# Altium PCB Relay_Controller_REV4.PcbDoc (part 1 of 2)
Units mil, origin at the board's own origin, x right, y up, seen from the top; angles counter-clockwise.
Board outline 5513 x 4000 mil, 2 copper layers (Top Layer, Bottom Layer), stack 62.2 mil thick; 134 components, 86 nets, 434 pads, 146 vias.
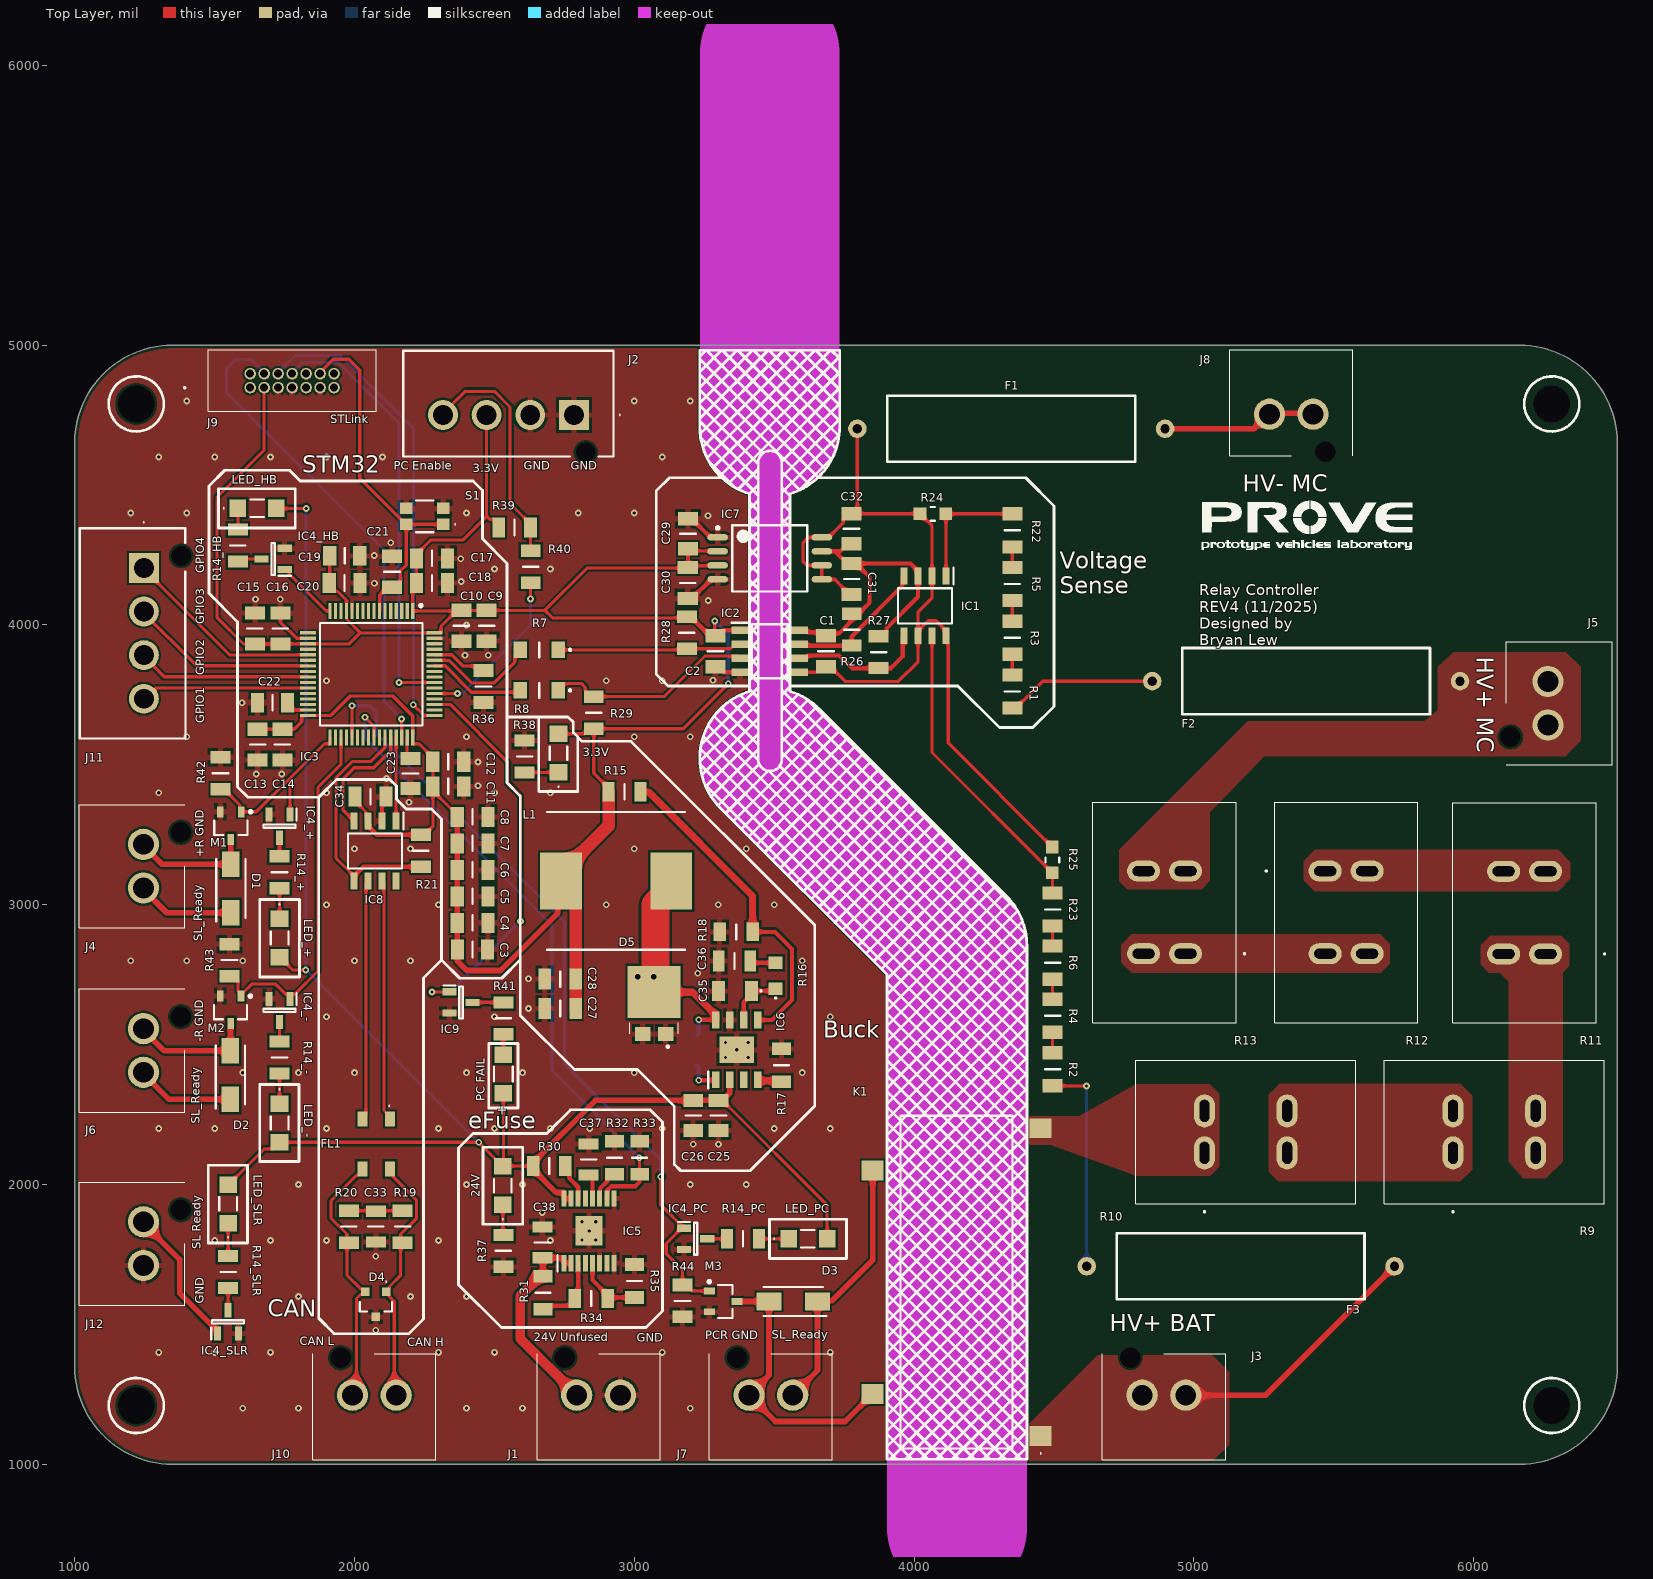
[diagram p0: Top Layer view]
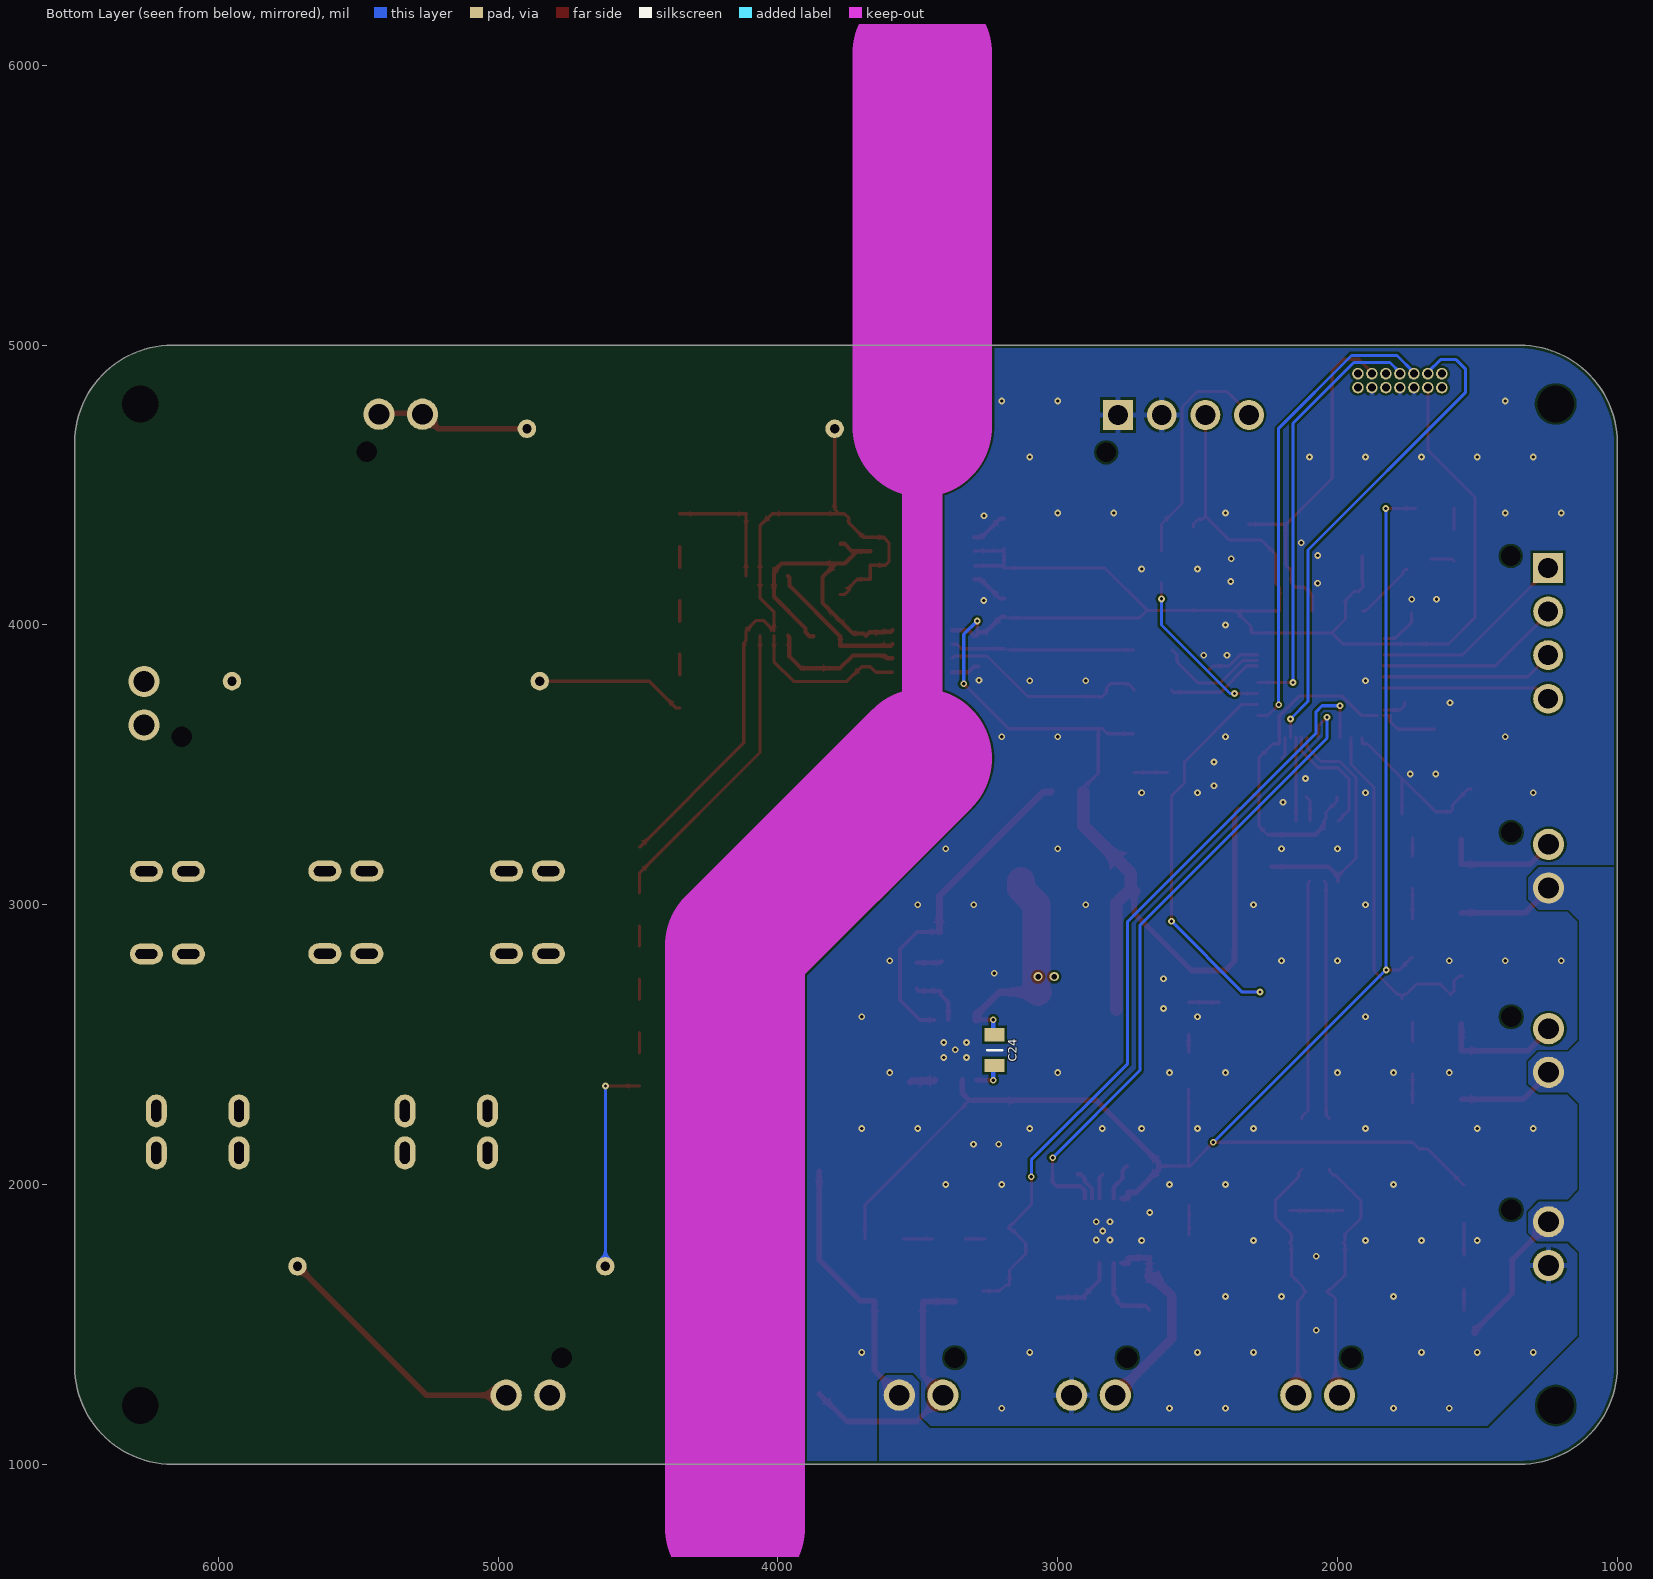
[diagram p1: Bottom Layer view, seen from below]
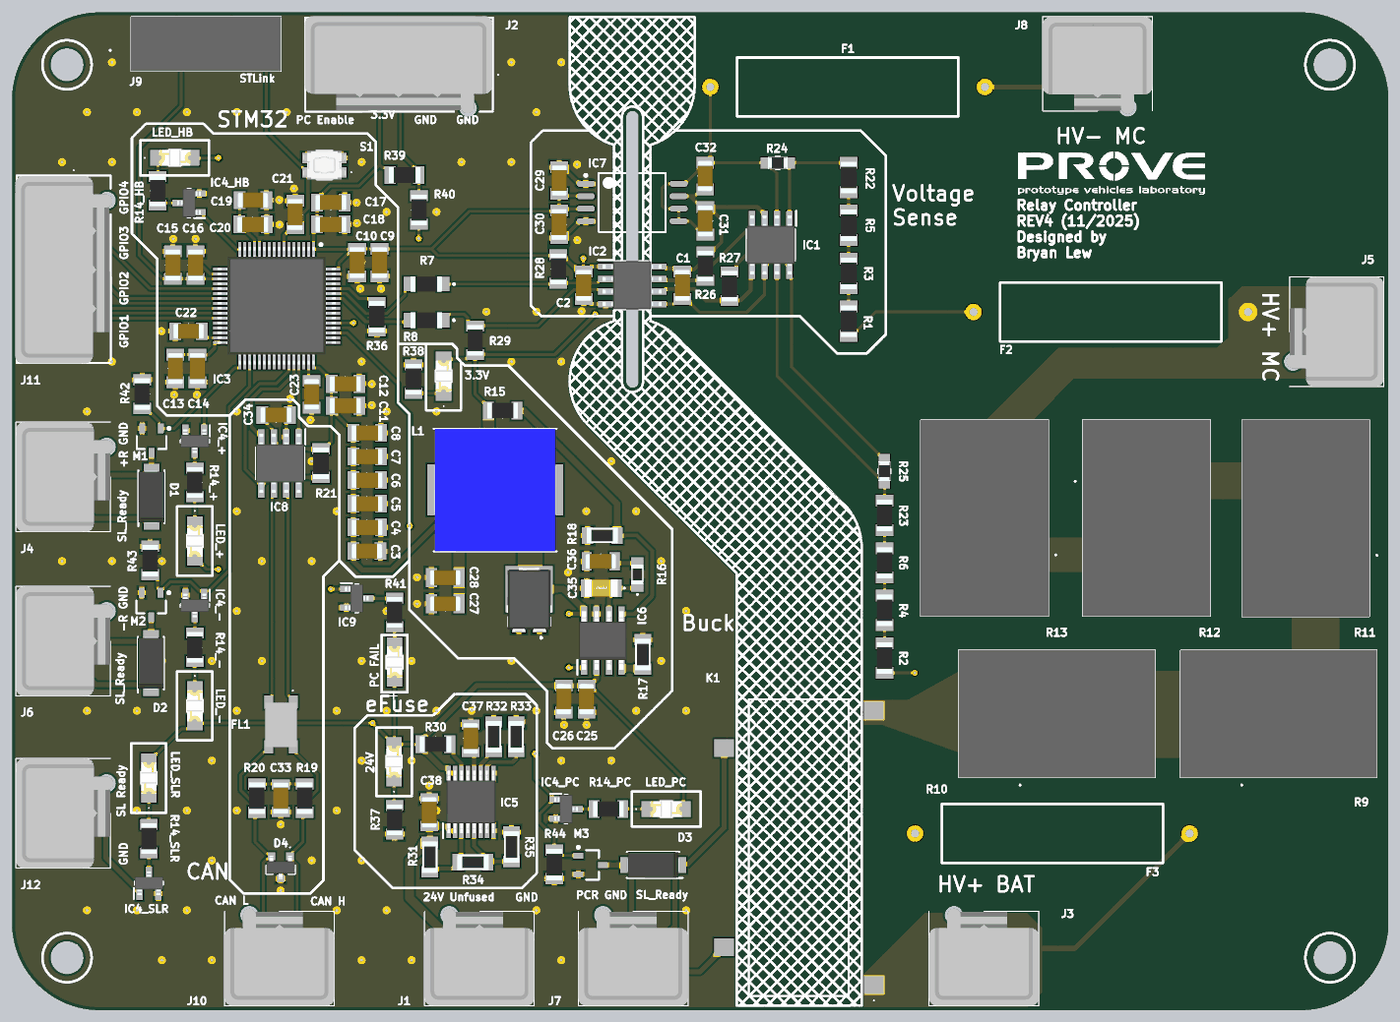
[diagram p2: 3D render of the assembled board from above, using the file's embedded part models]

## Layer stack, top to bottom
Top Solder: solder mask 0.4, Solder Resist, Dk 3.5
Top Layer: signal copper 1.4
Dielectric 1: dielectric 59.4, FR-4, Dk 4.3
Bottom Layer: signal copper 1.4
Bottom Solder: solder mask 0.4, Solder Resist, Dk 3.5

## Board outline
1000,1350 1000,4650 cw(c1350,4650) 1350,5000 6163,5000 cw(c6163,4650) 6513,4650 6513,1350 cw(c6163,1350) 6163,1000 1350,1000 cw(c1350,1350)
cut-out: 3459.97,3520 ccw(c3484.99,3520) 3510,3520 3510,4580 ccw(c3484.99,4580) 3459.97,4580

## Design rules (kind name [scope] priority, off if disabled: settings)
BoardOutlineClearance [All] p1: gap=11.81 ignorepadtopadclearanceinfootprint=FALSE except(15.75: Arc-SplitBarrior Arc-SplitContinuation Track-SplitBarrior Track-SplitContinuation SMDPad-SplitBarrior SMDPad-SplitContinuation THPad-SplitBarrior THPad-SplitContinuation Via-SplitBarrior Via-SplitContinuation Fill-SplitBarrior Fill-SplitContinuation Poly-SplitBarrior Poly-SplitContinuation Region-SplitBarrior Region-SplitContinuation Text-SplitBarrior Text-SplitContinuation)
Clearance "Clearance Different Nets" [All] p1: gap=7.87 ignorepadtopadclearanceinfootprint=FALSE except(3.5: Arc-Arc Arc-Track Arc-SMDPad Track-Track Track-SMDPad; 5: SMDPad-SMDPad SMDPad-Via THPad-Via Via-Via; 10: Arc-Via Arc-Text Track-Via Track-Text SMDPad-Text THPad-Text Via-Text Fill-Text Poly-Text Region-Text Text-Text; 19.68: THPad-THPad Via-Hole)
Clearance "Clearance Same Nets" [All] p2: gap=7.87 ignorepadtopadclearanceinfootprint=FALSE except(3.5: Arc-Arc Arc-Track Arc-SMDPad Track-Track Track-SMDPad SMDPad-SMDPad; 5: SMDPad-Via THPad-Via; 10: Arc-Via Arc-Text Track-Via Track-Text SMDPad-Text THPad-Text Via-Via Via-Text Fill-Text Poly-Text Region-Text Text-Text)
Clearance "Clearance Bottom Layer" [OnLayer('Bottom Layer')] p3: gap=8 ignorepadtopadclearanceinfootprint=TRUE except(10: Arc-Text Track-Text SMDPad-Text THPad-Text Via-Text Fill-Text Poly-Text Region-Text Text-Text)
Clearance "Clearance Top Layer" [OnLayer('Top Layer')] p4: gap=8 ignorepadtopadclearanceinfootprint=TRUE except(10: Arc-Text Track-Text SMDPad-Text THPad-Text Via-Text Fill-Text Poly-Text Region-Text Text-Text)
Height [All] p1 off: minheight=0 maxheight=1000 prefheight=500
HoleSize [All] p1: absolutevalues=TRUE maxlimit=248.03 minlimit=7.87 maxpercent=80.000 minpercent=20.000
MinimumAnnularRing [All] p1: minimumring=5.12
MinimumSolderMaskSliver [All] p1: minsoldermaskwidth=3.94
PolygonConnect PolygonConnectPowerPads [InPolygonClass('PowerPolygons')] p1: connectstyle=Direct reliefconductorwidth=10 reliefentries=4 polygonreliefangle="90 Angle" airgapwidth=10
PolygonConnect PolygonConnect_1 [All] p2: thpad.connectstyle=Relief thpad.reliefconductorwidth=20 thpad.reliefentries=4 thpad.polygonreliefangle="90 Angle" thpad.airgapwidth=10 smdpad.connectstyle=Relief smdpad.reliefconductorwidth=20 smdpad.reliefentries=4 smdpad.polygonreliefangle="90 Angle" smdpad.airgapwidth=10 via.connectstyle=Direct via.reliefconductorwidth=20 via.reliefentries=4 via.polygonreliefangle="90 Angle" via.airgapwidth=10
RoutingCorners [All] p1: cornerstyle=Round minsetback=100 maxsetback=100
RoutingVias [All] p1: holewidth=19.68 width=39.37 viastyle="Through Hole" minholewidth=7.87 minwidth=13.78 maxholewidth=39.37 maxwidth=78.74
SilkToSilkClearance [All] p1: silktosilkclearance=3.94
SilkToSolderMaskClearance [IsPad] p1: minsilkscreentomaskgap=3.94 clearancetoexposedcopper=TRUE
SolderMaskExpansion [All] p1: expansion=4 istentingtop=FALSE
SupplyNets "Schematic Supply Nets" [InNet('GND')] p1: voltage=0.000
Width [All] p1: maxlimit=100 minlimit=3.5 preferedwidth=15
24 further rules are at their usual default settings.

## Classes and differential pairs
component class PC_Fail: IC9 "PC FAIL" R41
component class VoltageSense: C1 C2 F1 F2 F3 IC1 IC2 R1 R2 R3 R4 R5 R6 R22 R23 R24 R25 R26 R27 R28 R29
component class +: IC4_+ LED_+ R14_+
component class -: IC4_- LED_- R14_-
component class CAN: C33 C34 D4 FL1 IC8 R19 R20 R21
component class "3.3V Isolation": C29 C30 C31 C32 IC7
polygon class PowerPolygons: HV+_BAT_L01_P007 HV+_MC_UNFUSED_L01_P029 NETK1_2_L01_P009 NETR9_2_L01_P013 NETR10_2_L01_P014 NETR11_2_L01_P015 NETR12_2_L01_P017 SL_READY_L02_P028
channel class LED_Driver: + - HB PC SLR
component class "24V to 3.3V Buck": 3.3V C24 C25 C26 C27 C28 C35 C36 D5 IC6 L1 R15 R16 R17 R18 R38
component class PC: IC4_PC LED_PC R14_PC
component class HB: IC4_HB LED_HB R14_HB
component class SLR: IC4_SLR LED_SLR R14_SLR
component class STM32: C3 C4 C5 C6 C7 C8 C9 C10 C11 C12 C13 C14 C15 C16 C17 C18 C19 C20 C21 C22 C23 IC3 R7 R8 R36 R39 R40 S1
component class "Relay Controller": D1 D2 D3 K1 M1 M2 M3 R9 R10 R11 R12 R13 R42 R43 R44
component class eFuse: 24V C37 C38 IC5 R30 R31 R32 R33 R34 R35 R37
component class Connectors: J1 J2 J3 J4 J5 J6 J7 J8 J9 J10 J11 J12

## Components (designator, comment, footprint, x,y, rotation, side; value= is the part's Value field where it differs from the comment)
3.3V "156120VS75000" 156120VS75000 2729,3542 r90 top
24V "156120VS75000" 156120VS75000 2530,1996 r90 top
C1 "100n" CAPC3216X94N 3685,3906 r270 top
C2 "100n" CAPC3216X94N 3290,3906 r270 top
C3 "4.7u" CAPC3216X180N 2421.41,2840 r0 top
C4 "100n" CAPC3216X94N 2422,2935.43 r0 top
C5 "100n" CAPC3216X94N 2422,3030.07 r0 top
C6 "100n" CAPC3216X94N 2422,3124.71 r0 top
C7 "100n" CAPC3216X94N 2422,3219.36 r0 top
C8 "100n" CAPC3216X94N 2422,3314 r0 top
C9 "100n" CAPC3216X94N 2472,3997 r270 top
C10 "100n" CAPC3216X94N 2382,3997 r270 top
C11 "100n" CAPC3216X94N 2335,3423 r0 top
C12 "100n" CAPC3216X94N 2335,3511 r0 top
C13 "100n" CAPC3216X94N 1654,3572.12 r270 top
C14 "100n" CAPC3216X94N 1742,3572.12 r270 top
C15 "100n" CAPC3216X94N 1644,3987 r90 top
C16 "100n" CAPC3216X94N 1735,3987 r90 top
C17 "100n" CAPC3216X94N 2277,4238 r0 top
C18 "100n" CAPC3216X94N 2277,4150 r0 top
C19 "1u" CAPC3216X180N 1965,4247 r0 top
C20 "100n" CAPC3216X94N 1964.41,4150 r0 top
C21 "100n" CAPC3216X94N 2134,4190 r90 top
C22 "2.2u" CAPC3216X180N 1707,3722 r180 top
C23 "2.2u" CAPC3216X180N 2200,3469 r270 top
C24 "100n" CAPC3216X94N 3225,2480 r90 bottom
C25 "4.7u" CAPC3216X180N 3301,2247 r270 top
C26 "4.7u" CAPC3216X180N 3210,2247 r270 top
C27 "CL31X107MQKNNWE" CAPC3216X190N 2735,2629 r180 top
C28 "CL31X107MQKNNWE" CAPC3216X190N 2735,2734 r180 top
C29 "10u" CAPC3216X180N 3191.79,4326 r90 top
C30 "100n" CAPC3216X94N 3191,4150 r270 top
C31 "100n" CAPC3216X94N 3776.79,4164 r270 top
C32 "22u" CAPC3216X180N 3776,4344 r90 top
C33 "4.7n" CAPC3216X75N 2076.39,1849.53 r270 top
C34 "100n" CAPC3216X94N 2057,3386 r0 top
C35 "18p" C1206 3360,2692 r180 top
C36 "22n" CAPC3216X170N 3358,2799 r180 top
C37 "0.47u" CAPC3216X152N 2837,2089.5 r90 top
C38 "1u" CAPC3216X178N 2671,1793 r90 top
D1 "RGF1M-E3_67A" DIOM5426X300N 1558,3058 r90 top
D2 "RGF1M-E3_67A" DIOM5426X300N 1556,2391 r90 top
D3 "RGF1M-E3_67A" DIOM5426X300N 3568,1582 r180 top
D4 "SM24CANB-02HTG" SM24CANB02HTG 2076,1572 r180 top
D5 "STPS5S100SFY" STPS10L40CSF 3070.94,2658.08 r0 top
F1 "0ADKP0500-RE" 0ADKP0500-RE 4347,4701 r180 top
F2 "0ADKP0500-RE" 0ADKP0500-RE 5401,3799 r180 top
F3 "0ADKP0500-RE" 0ADKP0500-RE 5167,1708 r180 top
FL1 "ACT45B-510-2P-TL003" ACT45B1012PTL003 2077,2145 r270 top
IC1 "MCP3422A1T-E_SN" SOIC127P600X175-8N 4039,4068 r270 top
IC2 "ISO1640BQDRQ1" SOIC127P600X175-8N 3484,3906 r0 top
IC3 "STM32F405RGT7" QFP50P1200X1200X160-64N 2060,3824 r270 top
IC4_+ "DMN61D8LQ-13" SOT96P240X110-3N 1732,3281.03 r270 top (schematic designator IC4)
IC4_- "DMN61D8LQ-13" SOT96P240X110-3N 1732,2622.03 r270 top (schematic designator IC4)
IC4_HB "DMN61D8LQ-13" SOT96P240X110-3N 1709,4236 r180 top (schematic designator IC4)
IC4_PC "DMN61D8LQ-13" SOT96P240X110-3N 3218.97,1806 r0 top (schematic designator IC4)
IC4_SLR "DMN61D8LQ-13" SOT96P240X110-3N 1548,1509 r90 top (schematic designator IC4)
IC5 "TPS26600PWPR" SOP65P640X120-17N 2837.8,1834.67 r90 top
IC6 "TPS54560BQDDARQ1" SOIC127P600X170-9N 3366,2481.23 r90 top
IC7 "MIE05W0505BGYE-3R-Z" SOIC127P1030X265-8N 3484,4238 r0 top
IC8 "TCAN337GD" SOIC127P600X175-8N 2073,3192 r270 top
IC9 "DMN61D8LQ-13" SOT96P240X110-3N 2380.52,2650.9 r0 top
J1 "1877285-2" 18772852 2872.05,1395.03 r0 top
J2 "1877285-4" 18772854 2783.91,4750.42 r180 top
J3 "1877285-2" 18772852 4892.95,1395.03 r0 top
J4 "1877285-2" 18772852 1393.46,3137.95 r270 top
J5 "1877285-2" 18772852 6116.97,3719.95 r90 top
J6 "1877285-2" 18772852 1393.46,2479.05 r270 top
J7 "1877285-2" 18772852 3487.95,1395.03 r0 top
J8 "1877285-2" 18772852 5348.05,4605.09 r180 top
J9 "SHF-107-01-L-D-TH" SHF10701LDTH 1627,4848 r0 top
J10 "1877285-2" 18772852 2071,1395.03 r0 top
J11 "1877285-4" 18772854 1247,4203.91 r270 top
J12 "1877285-2" 18772852 1393.46,1789.05 r270 top
K1 "KT24-1A-40L-SMD" KT241A40LSMD 4152,1651 r90 top
L1 "18uH" INDPM125125X800N 2935,3085 r180 top
LED_+ "156120VS75000" 156120VS75000 1732,2881 r270 top (schematic designator LED)
LED_- "156120VS75000" 156120VS75000 1732,2220 r270 top (schematic designator LED)
LED_HB "156120VS75000" 156120VS75000 1652,4417 r0 top (schematic designator LED)
LED_PC "156120VS75000" 156120VS75000 3620.28,1805.91 r0 top (schematic designator LED)
LED_SLR "156120VS75000" 156120VS75000 1548,1931 r90 top (schematic designator LED)
M1 "ZXMS6004FF-7" SOT95P240X100-3N 1558,3283 r270 top
M2 "ZXMS6004FF-7" SOT95P240X100-3N 1557,2624 r270 top
M3 "ZXMS6004FF-7" SOT95P240X100-3N 3317,1582 r0 top
"PC FAIL" "Red, 2V, 140°" "WL-SMRW_1206 rectangular_normal use" 2532,2395 r270 top
R1 "510k" RESC3216X75N 4351,3762 r270 top
R2 "510k" RESC3216X75N 4495,2411.94 r270 top
R3 "510k" RESC3216X75N 4351,3954 r270 top
R4 "510k" RESC3216X75N 4495,2603 r270 top
R5 "510k" RESC3216X75N 4351,4146 r270 top
R6 "510k" RESC3216X75N 4495,2792.94 r270 top
R7 "33" ERJ8ENF1000V 2660,3911 r180 top
R8 "33" ERJ8ENF1000V 2660,3766 r180 top
R9 "TWW20J100E" TWW20J100E 5037.72,2113 r0 top
R10 "TWW20J100E" TWW20J100E 5926,2113 r0 top
R11 "TWW20J100E" TWW20J100E 6256.77,2824 r90 top
R12 "TWW20J100E" TWW20J100E 5469,3120.28 r270 top
R13 "TWW20J100E" TWW20J100E 4970,2825 r90 top
R14_+ "1k" RESC3116X65N 1732,3116 r90 top (schematic designator R14)
R14_- "1k" RESC3116X65N 1732,2454 r90 top (schematic designator R14)
R14_HB "1k" RESC3116X65N 1583,4284 r270 top (schematic designator R14)
R14_PC "1k" RESC3116X65N 3388.09,1806 r180 top (schematic designator R14)
R14_SLR "1k" RESC3116X65N 1548,1687 r270 top (schematic designator R14)
R15 "36.5k" RESC3116X65N 2965,3404 r0 top
R16 "12.4k" ERJUP6 3505,2746 r90 top
R17 "383k" RESC3216X70N 3526,2426 r90 top
R18 "RN73H2BTTD1172F100" RESC3216X70N 3364,2903 r180 top
R19 "60.4" RESC3216X65N 2172,1849.53 r90 top
R20 "60.4" RESC3216X65N 1980,1849.53 r90 top
R21 "10k" RESC3216X65N 2237,3193 r90 top
R22 "510k" RESC3216X75N 4351,4338 r270 top
R23 "510k" RESC3216X75N 4495,2982.94 r270 top
R24 "12.1k" ERA6AEB101V 4067,4397 r180 top
R25 "12.1k" ERA6AEB101V 4494,3160 r90 top
R26 "2k" RESC3116X65N 3777,3983 r270 top
R27 "2k" RESC3116X65N 3873,3902.46 r270 top
R28 "2k" RESC3116X65N 3188,3972 r270 top
R29 "2k" RESC3116X65N 2855,3686 r90 top
R30 "100k" RESC3216X65N 2696,2066 r0 top
R31 "715k" RESC3216X70N 2673.36,1613 r270 top
R32 "6.04k" RESC3216X70N 2929,2096 r90 top
R33 "21k" RESC3216X70N 3019,2096 r90 top
R34 "20k" RESC3216X70N 2846,1593 r0 top
R35 "30.1k" RESC3216X70N 3001,1655 r90 top
R36 "100k" RESC3216X65N 2461,3780 r270 top
R37 "1k" RESC3116X65N 2532,1763 r270 top
R38 "1k" RESC3116X65N 2608,3530 r90 top
R39 "10k" RESC3216X65N 2572.09,4348 r180 top
R40 "1k" RESC3116X65N 2630,4208 r270 top
R41 "1k" RESC3116X65N 2532,2594.06 r90 top
R42 "100k" RESC3216X65N 1521,3470.09 r90 top
R43 "100k" RESC3216X65N 1553,2802 r90 top
R44 "100k" RESC3216X65N 3172,1584 r270 top
S1 "TL1030AF350AQJ" TL1030AF350AQJ 2251,4388 r180 top

## Footprints (in the part's own frame and the unit in brackets; to place one, negate y for a bottom-side part, rotate by r counter-clockwise, add the part's x,y. Pads: shape width x height; smd on the part's side, far side on the other; paste and mask are expansions set on the pad)
0ADKP0500-RE [mil]
  round 66 hole 33: 1(-550,0) 2(550,0)
  Multi-Layer pour cut-out: -443,118 -443,-118 443,-118 443,118
  silkscreen extent -443,-118 443,118
156120VS75000 [mm]
  rect 1.5x1.6 smd: 1(-1.75,0) 2(1.75,0)
  silkscreen extent -3.1,-0.8 0.6,0.8, body extent -1.6,-0.8 1.6,0.8, height 1.2
18772852 [mm]
  round 2.835 hole 1.89: 1(-1.98,-3.76) 2(1.98,-3.76)
  round 0.93 hole 1.86 unplated: 3(-3.06,-0.36)
  silkscreen extent -5.59,-9.6 5.59,0, body extent -5.59,-9.58 5.59,0.3, height 11.91
18772854 [mm]
  rect 2.715x2.715 hole 1.81: 1(0,0)
  round 2.715 hole 1.81: 2(3.96,0) 3(7.92,0) 4(11.88,0)
  round 0.89 hole 1.78 unplated: 5(-1.08,3.4)
  silkscreen extent -4.2,-5.82 15.49,3.77, body extent -3.56,-5.96 15.53,3.93, height 11.86
ACT45B1012PTL003 [mm]
  rect 1.35x0.9 smd: 1(-2.275,1.25) 2(-2.275,-1.25) 3(2.275,-1.25) 4(2.275,1.25)
  silkscreen extent -3.5,1.15 -3.4,1.25, body extent -2.22,-1.6 2.28,1.6, height 2.8
C1206 [mm]
  rect 1.15x1.8 smd: 1(-1.5,0) 2(1.5,0)
  silkscreen extent -2.4,-0.05 -2.3,0.05, body extent -1.7,-0.9 1.7,0.9, height 1.75
CAPC3216X75N [mm]
  rect 1.02x1.82 smd: 1(-1.4,0) 2(1.4,0)
  silkscreen extent 0,-0.7 0,0.7, body extent -1.6,-0.8 1.6,0.8, height 0.75
CAPC3216X94N [mm]
  rect 1.2x1.82 smd: 1(-1.4,0) 2(1.4,0)
  silkscreen extent 0,-0.7 0,0.7, body extent -1.6,-0.8 1.6,0.8, height 0.94
CAPC3216X152N [mm]
  rect 1.02x1.82 smd: 1(-1.4,0) 2(1.4,0)
  silkscreen extent 0,-0.7 0,0.7, body extent -1.6,-0.8 1.6,0.8, height 1.52
CAPC3216X170N [mm]
  rect 1.03x1.87 smd: 1(-1.42,0) 2(1.42,0)
  silkscreen extent 0,-0.7 0,0.7, body extent -1.6,-0.8 1.6,0.8, height 1.7
CAPC3216X178N [mm]
  rect 1.02x1.82 smd: 1(-1.4,0) 2(1.4,0)
  silkscreen extent 0,-0.7 0,0.7, body extent -1.6,-0.8 1.6,0.8, height 1.78
CAPC3216X180N [mm]
  rect 1.2x1.78 smd: 1(-1.36,0) 2(1.36,0)
  silkscreen extent 0,-0.7 0,0.7, body extent -1.6,-0.8 1.6,0.8, height 1.8
CAPC3216X190N [mm]
  rect 1.12x1.92 smd: 1(-1.4,0) 2(1.4,0)
  silkscreen extent 0,-0.7 0,0.7, body extent -1.6,-0.8 1.6,0.8, height 1.9
DIOM5426X300N [mm]
  rect 2.3x1.6 smd: 1(-2.2,0) 2(2.2,0)
  silkscreen extent -3,-1.32 2.68,1.32, body extent -2.68,-1.32 2.68,1.32, height 3
ERA6AEB101V [mm]
  rect 1.15x1.15 smd: 1(-1.175,0) 2(1.175,0)
  silkscreen extent -0.2,-0.63 0.2,0.63, body extent -1,-0.63 1,0.63, height 0.5
ERJ8ENF1000V [mm]
  rect 1.25x1.5 smd: 1(-1.725,0) 2(1.725,0)
  silkscreen extent -2.9,-0.67 0,0.67, body extent -1.6,-0.8 1.6,0.8, height 0.6
ERJUP6 [mm]
  rect 1.15x1.25 smd: 1(-1.175,0) 2(1.175,0)
  silkscreen extent -2.07,-0.05 -1.98,0.05, body extent -1,-0.63 1,0.63, height 0.6
INDPM125125X800N [mm]
  rect 3.8x5.2 smd: 1(-5,0) 2(5,0)
  silkscreen extent -6.25,-6.25 6.25,6.25, body extent -6.25,-6.25 6.25,6.25, height 8
KT241A40LSMD [mm]
  rect 1.8x2 smd: 1(-13.97,-7.62) 2(13.97,-7.62) 3(10.15,7.62) 4(-10.15,7.62)
  silkscreen extent -15.6,-7.67 15.1,5.1
QFP50P1200X1200X160-64N [mm]
  rect 1.475x0.3 smd: 1(-5.738,3.75) 2(-5.738,3.25) 3(-5.738,2.75) 4(-5.738,2.25) 5(-5.738,1.75) 6(-5.738,1.25) 7(-5.738,0.75) 8(-5.738,0.25) 9(-5.738,-0.25) 10(-5.738,-0.75) 11(-5.738,-1.25) 12(-5.738,-1.75) 13(-5.738,-2.25) 14(-5.738,-2.75) 15(-5.738,-3.25) 16(-5.738,-3.75) 33(5.738,-3.75) 34(5.738,-3.25) 35(5.738,-2.75) 36(5.738,-2.25) 37(5.738,-1.75) 38(5.738,-1.25) 39(5.738,-0.75) 40(5.738,-0.25) 41(5.738,0.25) 42(5.738,0.75) 43(5.738,1.25) 44(5.738,1.75) 45(5.738,2.25) 46(5.738,2.75) 47(5.738,3.25) 48(5.738,3.75)
  rect 0.3x1.475 smd: 17(-3.75,-5.738) 18(-3.25,-5.738) 19(-2.75,-5.738) 20(-2.25,-5.738) 21(-1.75,-5.738) 22(-1.25,-5.738) 23(-0.75,-5.738) 24(-0.25,-5.738) 25(0.25,-5.738) 26(0.75,-5.738) 27(1.25,-5.738) 28(1.75,-5.738) 29(2.25,-5.738) 30(2.75,-5.738) 31(3.25,-5.738) 32(3.75,-5.738) 49(3.75,5.738) 50(3.25,5.738) 51(2.75,5.738) 52(2.25,5.738) 53(1.75,5.738) 54(1.25,5.738) 55(0.75,5.738) 56(0.25,5.738) 57(-0.25,5.738) 58(-0.75,5.738) 59(-1.25,5.738) 60(-1.75,5.738) 61(-2.25,5.738) 62(-2.75,5.738) 63(-3.25,5.738) 64(-3.75,5.738)
  silkscreen extent -6.35,-4.65 4.65,4.65, body extent -6,-6 6,6, height 1.6
RESC3116X65N [mm]
  rect 1.1x1.8 smd: 1(-1.45,0) 2(1.45,0)
  silkscreen extent 0,-0.7 0,0.7, body extent -1.55,-0.8 1.55,0.8, height 0.65
RESC3216X65N [mm]
  rect 1.15x1.8 smd: 1(-1.45,0) 2(1.45,0)
  silkscreen extent 0,-0.7 0,0.7, body extent -1.6,-0.8 1.6,0.8, height 0.65
RESC3216X70N [mm]
  rect 1.15x1.7 smd: 1(-1.5,0) 2(1.5,0)
  silkscreen extent 0,-0.67 0,0.67, body extent -1.6,-0.8 1.6,0.8, height 0.6
RESC3216X75N [mm]
  rect 1.2x1.8 smd: 1(-1.5,0) 2(1.5,0)
  silkscreen extent 0,-0.7 0,0.7, body extent -1.6,-0.8 1.6,0.8, height 0.75
SHF10701LDTH [mm]
  round 1.05 hole 0.74: 1(0,0) 2(0,1.27) 3(1.27,0) 4(1.27,1.27) 5(2.54,0) 6(2.54,1.27) 7(3.81,0) 8(3.81,1.27) 9(5.08,0) 10(5.08,1.27) 11(6.35,0) 12(6.35,1.27) 13(7.62,0) 14(7.62,1.27)
  silkscreen extent -6,-2.16 11.43,3.43, body extent -3.81,-2.16 11.43,3.43, height 5.43
SM24CANB02HTG [mm]
  rect 0.78x0.78 smd: 1(-0.95,-1.145) 2(0.95,-1.145) 3(0,1.145)
  silkscreen extent -1.46,-2.1 1.46,0.65, body extent -1.46,-1.18 1.46,1.18, height 1.12
SOIC127P600X170-9N [mm]
  rect 1.525x0.65 smd: 1(-2.712,1.905) 2(-2.712,0.635) 3(-2.712,-0.635) 4(-2.712,-1.905) 5(2.712,-1.905) 6(2.712,-0.635) 7(2.712,0.635) 8(2.712,1.905)
  rect 2.4x3.1 smd: 9(0,0)
  silkscreen extent -3.47,2.58 -1.95,2.58, body extent -3,-2.45 3,2.45, height 1.57
SOIC127P600X175-8N [mm]
  rect 1.525x0.65 smd: 1(-2.712,1.905) 2(-2.712,0.635) 3(-2.712,-0.635) 4(-2.712,-1.905) 5(2.712,-1.905) 6(2.712,-0.635) 7(2.712,0.635) 8(2.712,1.905)
  silkscreen extent -3.47,-2.45 1.6,2.58, body extent -3,-2.45 3,2.45, height 1.75
SOIC127P1030X265-8N [mm] "SOIC, 8-Leads, Body 5.85x7.50mm, Pitch 1.27mm, IPC Medium Density"
  oval 1.85x0.6 smd: 1(-4.725,1.905) 2(-4.725,0.635) 3(-4.725,-0.635) 4(-4.725,-1.905) 5(4.725,-1.905) 6(4.725,-0.635) 7(4.725,0.635) 8(4.725,1.905)
  silkscreen extent -4.85,-3 3.4,3, body extent -3.8,-3 3.8,3, height 2.65
SOP65P640X120-17N [mm]
  rect 1.475x0.45 smd: 1(-2.938,2.275) 2(-2.938,1.625) 3(-2.938,0.975) 4(-2.938,0.325) 5(-2.938,-0.325) 6(-2.938,-0.975) 7(-2.938,-1.625) 8(-2.938,-2.275) 9(2.938,-2.275) 10(2.938,-1.625) 11(2.938,-0.975) 12(2.938,-0.325) 13(2.938,0.325) 14(2.938,0.975) 15(2.938,1.625) 16(2.938,2.275)
  rect 2.66x2.46 smd: 17(0,0)
  silkscreen extent -3.67,2.85 -2.2,2.85, body extent -3.2,-2.5 3.2,2.5, height 1.13
SOT95P240X100-3N [mm] "SOT23, 3-Leads, Body 2.90x2.40mm, Pitch 0.95mm, IPC Medium Density"
  rect 1x0.6 smd: 1(-1.25,0.95) 2(-1.25,-0.95) 3(1.25,0)
  silkscreen extent -1.37,-1.5 0.85,1.93, body extent -0.85,-1.5 0.85,1.5, height 1
SOT96P240X110-3N [mm]
  rect 1.3x0.65 smd: 1(-1.05,0.96) 2(-1.05,-0.96) 3(1.05,0)
  silkscreen extent -1.6,-1.45 0.15,1.54, body extent -1.2,-1.45 1.2,1.45, height 1.1
STPS10L40CSF [mm]
  rect 1.4x1.27 smd: 1(1.04,-3.05) 2(-1.04,-3.05)
  rect 4.8x4.72 smd: 3(0,0.755)
  silkscreen extent -2.2,-4.3 2.2,-2.05, body extent -2.3,-3.54 2.3,2.96, height 1.1
TL1030AF350AQJ [mm]
  rect 1.15x1.05 smd: 1(-1.675,0.725) 2(-1.675,-0.725) 3(1.675,0.725) 4(1.675,-0.725)
  silkscreen extent -2.8,-1.45 0.8,1.45, body extent -2.16,-1.45 2.16,1.45, height 1.71
TWW20J100E [mm]
  oval 1.9x3 hole 0.9 slot 2 at 90 deg: 1(0,0) 2(7.5,0) 3(7.5,3.81) 4(0,3.81)
  silkscreen extent -6.25,-5.4 13.75,8.4, body extent -6.25,-4.59 13.75,8.4, height 46.1
"WL-SMRW_1206 rectangular_normal use" [mm] "SMD Mono-color Reverse mount LED, body 3.2x1.2mm"
  rect 1.5x1.6 smd: 1(-1.75,0) 2(1.75,0)
  silkscreen extent -0.65,-0.85 0.65,0.85, body extent -1.6,-0.8 1.6,0.8, height 1.2

## Part data
3.3V 24V LED_+ LED_- LED_HB LED_PC LED_SLR: "LED", Manufacturer_Name="Wurth Elektronik", Mouser Part Number=710-156120VS75000, Datasheet Link=https://www.we-online.com/components/products/datasheet/156120VS75000.pdf, Height=1.3mm, Manufacturer_Part_Number=156120VS75000, Mouser Price/Stock=https://www.mouser.co.uk/ProductDetail/Wurth-Elektronik/156120VS75000?qs=2kOmHSv6VfQAUFg5BeuEfQ%3D%3D
C1 C2 C4 C5 C6 C7 C8 C9 C10 C11 C12 C13 C14 C15 C16 C17 C18 C20 C21 C24 C30 C31 C34: library part 12065C104J4Z2A, "Capacitor", Manufacturer_Name="Kyocera AVX", Mouser Part Number=581-12065C104J4Z2A, Datasheet Link=https://spicat.kyocera-avx.com/product/mlcc/chartview/12065C104J4Z2A/DataSheet/X7R, Height=0.94mm, Manufacturer_Part_Number=12065C104J4Z2A, Mouser Price/Stock=https://www.mouser.com/Search/Refine.aspx?Keyword=581-12065C104J4Z2A
C3 C25 C26: library part GMK316AB7475KLHT, "Capacitor", Manufacturer_Name="TAIYO YUDEN", Mouser Part Number=963-GMK316AB7475KLHT, Arrow Part Number=GMK316AB7475KLHT, Arrow Price/Stock=https://www.arrow.com/en/products/gmk316ab7475klht/taiyo-yuden?utm_currency=USD&region=nac, Datasheet Link=https://ds.yuden.co.jp/TYCOMPAS/ap/specSheet?pn=MMASG31LAB7475KTNA01, Height=1.8mm, Manufacturer_Part_Number=GMK316AB7475KLHT, Mouser Price/Stock=https://www.mouser.co.uk/ProductDetail/TAIYO-YUDEN/GMK316AB7475KLHT?qs=CNQs48zzdnoeKLJ9%2F6WNWQ%3D%3D
C19: library part HMK316B7105KLHT, "Capacitor", Manufacturer_Name="TAIYO YUDEN", Mouser Part Number=963-HMK316B7105KLHT, Arrow Part Number=HMK316B7105KLHT, Arrow Price/Stock=null?utm_currency=USD&region=nac, Datasheet Link=https://mouser.componentsearchengine.com/Datasheets/1/HMK316B7105KLHT.pdf, Height=1.8mm, Manufacturer_Part_Number=HMK316B7105KLHT, Mouser Price/Stock=https://www.mouser.co.uk/ProductDetail/TAIYO-YUDEN/HMK316B7105KLHT?qs=sz8xDBnIhcFmvpGfTAF0nQ%3D%3D
C22 C23: library part CL31B225KCHSNNE, "Capacitor", Manufacturer_Name=SAMSUNG, Mouser Part Number=187-CL31B225KCHSNNE, Arrow Part Number=CL31B225KCHSNNE, Arrow Price/Stock=https://www.arrow.com/en/products/cl31b225kchsnne/samsung-electro-mechanics?utm_currency=USD&region=nac, Datasheet Link=https://ms.componentsearchengine.com/Datasheets/2/CL31B225KCHSNNE.pdf, Height=1.8mm, Manufacturer_Part_Number=CL31B225KCHSNNE, Mouser Price/Stock=https://www.mouser.co.uk/ProductDetail/Samsung-Electro-Mechanics/CL31B225KCHSNNE?qs=EqekMjxHB%2FO4jGlN37Y2aA%3D%3D
C27 C28: "Capacitor", Manufacturer_Name=SAMSUNG, Mouser Part Number=187-CL31X107MQKNNWE, Datasheet Link=https://www.digikey.sg/en/products/detail/samsung-electro-mechanics/CL31X107MQKNNWE/25854287?srsltid=AfmBOoqYZ52GRQ9Xlh8bi0lGOe-KtDJ1wz9-WyaigKcCVSEueXc8l4on, Height=1.9mm, Manufacturer_Part_Number=CL31X107MQKNNWE, Mouser Price/Stock=https://www.mouser.co.uk/ProductDetail/Samsung-Electro-Mechanics/CL31X107MQKNNWE?qs=Jm2GQyTW%2FbjTv%252BH%2F%252BndEuA%3D%3D
C29: library part MLASU31LBB5106KTNA01, "Capacitor", Manufacturer_Name="TAIYO YUDEN", Datasheet Link=https://mm.digikey.com/Volume0/opasdata/d220001/medias/docus/5731/MLR01_e.pdf, Height=1.8mm, Manufacturer_Part_Number=MLASU31LBB5106KTNA01
C32: library part GGM31CD70J226KE02L, "Capacitor", Manufacturer_Name="Murata Electronics", Datasheet Link=https://search.murata.co.jp/Ceramy/image/img/A01X/G101/ENG/GGM31CD70J226KE02-01.pdf, Height=1.8mm, Manufacturer_Part_Number=GGM31CD70J226KE02L
C33: library part KAM31GR71H475KL, "Capacitor", Manufacturer_Name="Kyocera AVX", Mouser Part Number=581-KAM31GR71H475KL, Datasheet Link=https://www.mouser.jp/datasheet/2/40/AutoMLCCKAM-3216307.pdf, Height=0.75mm, Manufacturer_Part_Number=KAM31GR71H475KL, Mouser Price/Stock=https://www.mouser.co.uk/ProductDetail/KYOCERA-AVX/KAM31GR71H475KL?qs=Jm2GQyTW%2FbjSbY1tCxiE1g%3D%3D
C35: library part C1206C180FGGACTU, "Capacitor", Manufacturer_Name=KEMET, Datasheet Link=https://content.kemet.com/datasheets/KEM_C1009_C0G_HV_SMD.pdf, Manufacturer_Part_Number=C1206C180FGGACTU
C36: library part VJ1206Y223KXBAC, "Capacitor", Manufacturer_Name=Vishay, Mouser Part Number=77-VJ1206Y223KXBAC, Datasheet Link=http://www.vishay.com/docs/45200/vjhirelseries.pdf, Height=1.7mm, Manufacturer_Part_Number=VJ1206Y223KXBAC, Mouser Price/Stock=https://www.mouser.co.uk/ProductDetail/Vishay-Vitramon/VJ1206Y223KXBAC?qs=DS7Z8uEdLNy5V8LiZ3YDHg%3D%3D
C37: library part KAF31ER71H474KL, "Capacitor", Manufacturer_Name="Kyocera AVX", Mouser Part Number=581-KAF31ER71H474KL, Arrow Part Number=KAF31ER71H474KL, Arrow Price/Stock=https://www.arrow.com/en/products/kaf31er71h474kl/avx?region=nac, Datasheet Link=https://datasheets.kyocera-avx.com/AutoMLCCKAF.pdf, Height=1.52mm, Manufacturer_Part_Number=KAF31ER71H474KL, Mouser Price/Stock=https://www.mouser.co.uk/ProductDetail/KYOCERA-AVX/KAF31ER71H474KL?qs=Jm2GQyTW%2FbjNZ75fHRRUJA%3D%3D
C38: library part KGF31GR72A105KU, "Capacitor", Manufacturer_Name="Kyocera AVX", Mouser Part Number=581-KGF31GR72A105KU, Arrow Part Number=KGF31GR72A105KU, Arrow Price/Stock=https://www.arrow.com/en/products/kgf31gr72a105ku/avx?utm_currency=USD&region=nac, Datasheet Link=https://spicat.kyocera-avx.com/datasheet/KGF31GR72A105KU, Height=1.78mm, Manufacturer_Part_Number=KGF31GR72A105KU, Mouser Price/Stock=https://www.mouser.co.uk/ProductDetail/KYOCERA-AVX/KGF31GR72A105KU?qs=Jm2GQyTW%2Fbi7xkmery9bvA%3D%3D
D1 D2 D3: "Diode", Arrow Part Number=RGF1M-E3/67A, Manufacturer_Name=Vishay, Mouser Part Number=625-RGF1M-E3, Arrow Price/Stock=https://www.arrow.com/en/products/rgf1m-e367a/vishay?region=nac, Datasheet Link=https://www.vishay.com/docs/88697/rgf1.pdf, Height=3mm, Manufacturer_Part_Number=RGF1M-E3/67A, Mouser Price/Stock=https://www.mouser.co.uk/ProductDetail/Vishay-General-Semiconductor/RGF1M-E3-67A?qs=4xyK702%2F%252BQ1dl%252BTCdyIThg%3D%3D
D4: "TVS Diode (Bi-directional)", Manufacturer_Name=LITTELFUSE, Mouser Part Number=576-SM24CANB-02HTG, Arrow Part Number=SM24CANB-02HTG, Arrow Price/Stock=https://www.arrow.com/en/products/sm24canb-02htg/littelfuse?utm_currency=USD&region=nac, Datasheet Link=https://www.littelfuse.com/products/overvoltage-protection/tvs-diode-arrays/general-purpose/sm24canb/sm24canb-02htg, Height=1.12mm, Manufacturer_Part_Number=SM24CANB-02HTG, Mouser Price/Stock=https://www.mouser.co.uk/ProductDetail/Littelfuse/SM24CANB-02HTG?qs=bWsWnctWn1wbKmCYlcUmHw%3D%3D
D5: "Schottky Diode with Dual Anode", Manufacturer_Name=STMicroelectronics, Mouser Part Number=511-STPS5S100SFY, Datasheet Link=https://www.st.com/resource/en/datasheet/stps5s100sfy.pdf, Height=1.2mm, Manufacturer_Part_Number=STPS5S100SFY, Mouser Price/Stock=https://www.mouser.co.uk/ProductDetail/STMicroelectronics/STPS5S100SFY?qs=IS%252B4QmGtzzqXirfVtJ7lSA%3D%3D
F1 F2 F3: "Fuse"
FL1: "Filter", Manufacturer_Name=TDK, Mouser Part Number=810-ACT45B5102PTL003, Arrow Part Number=ACT45B-510-2P-TL003, Arrow Price/Stock=https://www.arrow.com/en/products/act45b-510-2p-tl003/tdk?utm_currency=USD&region=nac, Datasheet Link=https://product.tdk.com/system/files/dam/doc/product/emc/emc/cmf_cmc/catalog/cmf_automotive_signal_act45b_en.pdf, Height=3mm, Manufacturer_Part_Number=ACT45B-510-2P-TL003, Mouser Price/Stock=https://www.mouser.co.uk/ProductDetail/TDK/ACT45B-510-2P-TL003?qs=U1cgCdF9Le9LCroNYLqljw%3D%3D
IC1: "Integrated Circuit", Arrow Part Number=MCP3422A1T-E/SN, Manufacturer_Name=Microchip, Mouser Part Number=579-MCP3422A1T-E/SN, Arrow Price/Stock=https://www.arrow.com/en/products/mcp3422a1t-esn/microchip-technology, Datasheet Link=https://ww1.microchip.com/downloads/en/DeviceDoc/22088c.pdf, Height=1.75mm, Manufacturer_Part_Number=MCP3422A1T-E/SN, Mouser Price/Stock=https://www.mouser.co.uk/ProductDetail/Microchip-Technology/MCP3422A1T-E-SN?qs=X98pPdo4MrvBbe3HwfJ%252Bfw%3D%3D
IC2: "Integrated Circuit", Manufacturer_Name="Texas Instruments", Mouser Part Number=595-ISO1640BQDRQ1, Arrow Part Number=ISO1640BQDRQ1, Arrow Price/Stock=https://www.arrow.com/en/products/iso1640bqdrq1/texas-instruments?region=nac, Datasheet Link=https://www.ti.com/lit/ds/symlink/iso1640.pdf, Height=1.75mm, Manufacturer_Part_Number=ISO1640BQDRQ1, Mouser Price/Stock=https://www.mouser.co.uk/ProductDetail/Texas-Instruments/ISO1640BQDRQ1?qs=QNEnbhJQKvat3Z1mRPODGw%3D%3D
IC3: "Integrated Circuit", Manufacturer_Name=STMicroelectronics, Mouser Part Number=511-STM32F405RGT7, Arrow Part Number=STM32F405RGT7, Arrow Price/Stock=https://www.arrow.com/en/products/stm32f405rgt7/stmicroelectronics?utm_currency=USD&region=nac, Datasheet Link=https://www.st.com/content/ccc/resource/technical/document/datasheet/ef/92/76/6d/bb/c2/4f/f7/DM00037051.pdf/files/DM00037051.pdf/jcr:content/translations/en.DM00037051.pdf, Height=1.6mm, Manufacturer_Part_Number=STM32F405RGT7, Mouser Price/Stock=https://www.mouser.co.uk/ProductDetail/STMicroelectronics/STM32F405RGT7?qs=DqCdCwOw4%2F6rAq3yUvY8rA%3D%3D
IC4_+ IC4_- IC4_HB IC4_PC IC4_SLR IC9: "Integrated Circuit", Manufacturer_Name="Diodes Incorporated", Mouser Part Number=621-DMN61D8LQ-13, Arrow Part Number=DMN61D8LQ-13, Arrow Price/Stock=https://www.arrow.com/en/products/dmn61d8lq-13/diodes-incorporated?utm_currency=USD&region=nac, Datasheet Link=https://www.diodes.com//assets/Datasheets/DMN61D8LQ.pdf, Height=1.1mm, Manufacturer_Part_Number=DMN61D8LQ-13, Mouser Price/Stock=https://www.mouser.co.uk/ProductDetail/Diodes-Incorporated/DMN61D8LQ-13?qs=DBvH5xl4UymJgoulTjiNCg%3D%3D
IC5: "Integrated Circuit", Manufacturer_Name="Texas Instruments", Mouser Part Number=595-TPS26600PWPR, Arrow Part Number=TPS26600PWPR, Arrow Price/Stock=https://www.arrow.com/en/products/tps26600pwpr/texas-instruments?region=nac, Datasheet Link=http://www.ti.com/lit/gpn/tps2660, Height=1.2mm, Manufacturer_Part_Number=TPS26600PWPR, Mouser Price/Stock=https://www.mouser.co.uk/ProductDetail/Texas-Instruments/TPS26600PWPR?qs=Bho%2FbeBaDExFVQBFO8fB%2FQ%3D%3D
IC6: "Integrated Circuit", Manufacturer_Name="Texas Instruments", Mouser Part Number=595-TPS54560BQDDARQ1, Arrow Part Number=TPS54560BQDDARQ1, Arrow Price/Stock=https://www.arrow.com/en/products/tps54560bqddarq1/texas-instruments?utm_currency=USD&region=nac, Datasheet Link=http://www.ti.com/lit/gpn/tps54560b-q1, Height=1.7mm, Manufacturer_Part_Number=TPS54560BQDDARQ1, Mouser Price/Stock=https://www.mouser.co.uk/ProductDetail/Texas-Instruments/TPS54560BQDDARQ1?qs=Mv7BduZupUi0AsDfghsxzg%3D%3D
IC8: "Integrated Circuit", Manufacturer_Name="Texas Instruments", Mouser Part Number=595-TCAN337GD, Arrow Part Number=TCAN337GD, Arrow Price/Stock=https://www.arrow.com/en/products/tcan337gd/texas-instruments?region=europe, Datasheet Link=https://www.arrow.com/en/products/tcan337gd/texas-instruments, Height=1.75mm, Manufacturer_Part_Number=TCAN337GD, Mouser Price/Stock=https://www.mouser.co.uk/ProductDetail/Texas-Instruments/TCAN337GD?qs=gMfM3zrbS4qmjQESf%252BTgJw%3D%3D
J1 J3 J4 J5 J6 J7 J8 J10 J12: "Connector", Manufacturer_Name="TE Connectivity", Mouser Part Number=571-1877285-2, Arrow Part Number=1877285-2, Arrow Price/Stock=https://www.arrow.com/en/products/1877285-2/te-connectivity?region=europe, Datasheet Link=https://www.te.com/commerce/DocumentDelivery/DDEController?Action=srchrtrv&DocNm=7-1773458-5_ECONOMY_POWER_QRG&DocType=Data%20Sheet&DocLang=English&PartCntxt=1877285-2&DocFormat=pdf, Height=12mm, Manufacturer_Part_Number=1877285-2, Mouser Price/Stock=https://www.mouser.co.uk/ProductDetail/TE-Connectivity/1877285-2?qs=ka3zfMQDmFlAIZq5pDt5JA%3D%3D
J2 J11: "Connector", Manufacturer_Name="TE Connectivity", Mouser Part Number=571-1877285-4, Arrow Part Number=1877285-4, Arrow Price/Stock=https://www.arrow.com/en/products/1877285-4/te-connectivity?region=nac, Datasheet Link=https://www.te.com/commerce/DocumentDelivery/DDEController?Action=srchrtrv&DocNm=1877285&DocType=Customer%20Drawing&DocLang=English&PartCntxt=1877285-4&DocFormat=pdf, Height=12.5mm, Manufacturer_Part_Number=1877285-4, Mouser Price/Stock=https://www.mouser.co.uk/ProductDetail/TE-Connectivity/1877285-4?qs=ka3zfMQDmFkZPBtotDIXvQ%3D%3D
J9: "Connector", Manufacturer_Name=SAMTEC, Mouser Part Number=200-SHF10701LDTH, Arrow Part Number=SHF-107-01-L-D-TH, Arrow Price/Stock=https://www.arrow.com/en/products/shf-107-01-l-d-th/samtec?utm_currency=USD&region=nac, Datasheet Link=https://componentsearchengine.com/Datasheets/1/SHF-107-01-L-D-TH.pdf, Height=5.33mm, Manufacturer_Part_Number=SHF-107-01-L-D-TH, Mouser Price/Stock=https://www.mouser.co.uk/ProductDetail/Samtec/SHF-107-01-L-D-TH?qs=%252BZP6%2F%252BtExtDrbekpOnhfag%3D%3D
K1: "Relay or Contactor", Manufacturer_Name=Meder, Mouser Part Number=876-KT24-1A-40L-SMD, Datasheet Link=https://www.mouser.de/datasheet/2/262/9024185401e-1633625.pdf, Height=8.7mm, Manufacturer_Part_Number=KT24-1A-40L-SMD, Mouser Price/Stock=https://www.mouser.co.uk/ProductDetail/MEDER-electronic-Standex/KT24-1A-40L-SMD?qs=mUCnLpxNPte72XvEBELL9g%3D%3D
L1: library part SRR1280-180M, "Inductor", Manufacturer_Name=Bourns, Mouser Part Number=652-SRR1280-180M, Arrow Part Number=SRR1280-180M, Arrow Price/Stock=https://www.arrow.com/en/products/srr1280-180m/bourns?region=nac, Datasheet Link=https://www.bourns.com/docs/Product-Datasheets/SRR1280.pdf, Height=8mm, Manufacturer_Part_Number=SRR1280-180M, Mouser Price/Stock=https://www.mouser.co.uk/ProductDetail/Bourns/SRR1280-180M?qs=brMhP%2FMjUfeRcSm%2FRxSrFQ%3D%3D
"PC FAIL": library part 156120RS75000, "WL-SMRW Mono-color Reverse mount Waterclear, SMT, size 1206 rectangular, Red, 2V, 140°", Case/Size Code="1206 rectangular", Emitting Color=Red, Forward Voltage=2V, Manufacturer="Wurth Elektronik", Operating Temperature Max=85°C, Operating Temperature Min=-40°C, Category="Signal LEDs", Chip Technology=AlInGaP, ComponentLink1Description="Website Link", ComponentLink1URL=https://www.we-online.com/redexpert/article/156120RS75000?ad, ComponentLink2Description="Datasheet Link", ComponentLink2URL=https://www.we-online.com/redexpert/spec/156120RS75000?ad, Dominant Wavelength=624nm, Height=1.2mm, Length=3.2mm, Luminous Intensity=60mcd, Manufacturer Part Number=156120RS75000, Match Code=WL-SMRW, Mount="Surface Mount", Packaging="Tape and Reel", Peak Wavelength=632nm, Viewing Angle=140°, Width=1.6mm
R1 R2 R3 R4 R5 R6 R22 R23: library part CR1206-FX-5103ELF, "Resistor", Manufacturer_Name=Bourns, Mouser Part Number=652-CR1206FX-5103ELF, Arrow Part Number=CR1206-FX-5103ELF, Arrow Price/Stock=https://www.arrow.com/en/products/cr1206-fx-5103elf/bourns?region=europe, Datasheet Link=http://componentsearchengine.com/Datasheets/1/CR1206-FX-5103ELF.pdf, Height=0.75mm, Manufacturer_Part_Number=CR1206-FX-5103ELF, Mouser Price/Stock=https://www.mouser.co.uk/ProductDetail/Bourns/CR1206-FX-5103ELF?qs=O4EQhShwvrpqwloF6Ll%2FVg%3D%3D
R7 R8: library part ERJ-8ENF33R0V, "Resistor", Manufacturer_Name=Panasonic, Mouser Part Number=667-ERJ-8ENF33R0V, Datasheet Link=https://industrial.panasonic.com/cdbs/www-data/pdf/RDA0000/AOA0000C86.pdf, Height=0.7mm, Manufacturer_Part_Number=ERJ-8ENF33R0V, Mouser Price/Stock=https://www.mouser.co.uk/ProductDetail/Panasonic/ERJ-8ENF33R0V?qs=8%252BG0TiN%2FgVpb1yH%2F8k6uQg%3D%3D
R9 R10 R11 R12 R13: "Resistor", Manufacturer_Name=Ohmite, Mouser Part Number=588-TWW20J100E, Datasheet Link=https://www.mouser.in/datasheet/2/303/res_tww_twm-1228653.pdf, Height=46mm, Manufacturer_Part_Number=TWW20J100E, Mouser Price/Stock=https://www.mouser.co.uk/ProductDetail/Ohmite/TWW20J100E?qs=PzGy0jfpSMsE3rbWfgqD2A%3D%3D
R14_+ R14_- R14_HB R14_PC R14_SLR R37 R38 R40 R41: library part CRGS1206J1K0, "Resistor", Manufacturer_Name="TE Connectivity", Mouser Part Number=279-CRGS1206J1K0, Datasheet Link=https://www.te.com/commerce/DocumentDelivery/DDEController?Action=srchrtrv&DocNm=9-1773463-8&DocType=Data%20Sheet&DocLang=English&PartCntxt=3-2176245-7&DocFormat=pdf, Height=0.65mm, Manufacturer_Part_Number=CRGS1206J1K0, Mouser Price/Stock=https://www.mouser.com/Search/Refine.aspx?Keyword=279-CRGS1206J1K0
R15: library part CRCW120636K5FKEAHP, "Resistor", Manufacturer_Name=Vishay, Mouser Part Number=71-CRCW120636K5FKEAH, Arrow Part Number=CRCW120636K5FKEAHP, Arrow Price/Stock=https://www.arrow.com/en/products/crcw120636k5fkeahp/vishay?region=nac, Height=0.65mm, Manufacturer_Part_Number=CRCW120636K5FKEAHP, Mouser Price/Stock=https://www.mouser.co.uk/ProductDetail/Vishay-Dale/CRCW120636K5FKEAHP?qs=VAB4DzKv5wUp%2FbasZHay7w%3D%3D
R16: library part ERJ-UP6F1242V, "Resistor", Manufacturer_Name=Panasonic, Mouser Part Number=667-ERJ-UP6F1242V, Datasheet Link=https://industrial.panasonic.com/cdbs/www-data/pdf/RDP0000/AOA0000C337.pdf, Height=0.7mm, Manufacturer_Part_Number=ERJ-UP6F1242V, Mouser Price/Stock=https://www.mouser.co.uk/ProductDetail/Panasonic/ERJ-UP6F1242V?qs=dbcCsuKDzFVg0bvXpJGfbQ%3D%3D
R17: library part ERA-8AEB3833V, "Resistor", Manufacturer_Name=Panasonic, Datasheet Link=https://industrial.panasonic.com/cdbs/www-data/pdf/RDM0000/AOA0000C307.pdf, Height=0.7mm, Manufacturer_Part_Number=ERA-8AEB3833V
R18: "Resistor", Manufacturer_Name="KOA Speer", Mouser Part Number=660-RN73H2BT1172F100, Datasheet Link=https://www.koaspeer.com/pdfs/RN73H.pdf, Height=0.7mm, Manufacturer_Part_Number=RN73H2BTTD1172F100, Mouser Price/Stock=https://www.mouser.co.uk/ProductDetail/KOA-Speer/RN73H2BTTD1172F100?qs=egkD4cx1ihS0KaGLrT%2FVSQ%3D%3D
R19 R20: library part ESR18EZPF60R4, "Resistor", Manufacturer_Name="ROHM Semiconductor", Datasheet Link=https://datasheet.datasheetarchive.com/originals/dk/DKDS-18/356400.pdf, Height=0.65mm, Manufacturer_Part_Number=ESR18EZPF60R4
R21 R39: library part SFR18EZPJ103, "Resistor", Manufacturer_Name="ROHM Semiconductor", Datasheet Link=https://fscdn.rohm.com/en/products/databook/datasheet/passive/resistor/chip_resistor/sfr-e.pdf, Height=0.65mm, Manufacturer_Part_Number=SFR18EZPJ103
R24 R25: library part ERA-6AEB1212V, "Resistor", Manufacturer_Name=Panasonic, Mouser Part Number=667-ERA-6AEB1212V, Datasheet Link=https://industrial.panasonic.com/cdbs/www-data/pdf/RDM0000/AOA0000C307.pdf, Height=0.6mm, Manufacturer_Part_Number=ERA-6AEB1212V, Mouser Price/Stock=https://www.mouser.co.uk/ProductDetail/Panasonic/ERA-6AEB1212V?qs=DyUWGjl%252BcVvcV08sco2Dng%3D%3D
R26 R27 R28 R29: library part CHP1206AFX-2001ELF, "Resistor", Manufacturer_Name=Bourns, Mouser Part Number=652-CHP1206AFX-2001L, Datasheet Link=https://www.mouser.mx/datasheet/2/54/chp-a-1858677.pdf, Height=0.65mm, Manufacturer_Part_Number=CHP1206AFX-2001ELF, Mouser Price/Stock=https://www.mouser.co.uk/ProductDetail/Bourns/CHP1206AFX-2001ELF?qs=GedFDFLaBXERFI3Dnxqg6Q%3D%3D
R30 R36 R42 R43 R44: library part MCA1206ME1003BP500, "Resistor", Manufacturer_Name=Vishay, Datasheet Link=https://www.vishay.com/docs/28700/mcx0x0xpre.pdf, Height=0.65mm, Manufacturer_Part_Number=MCA1206ME1003BP500
R31: library part ERA-8AEB7153V, "Resistor", Manufacturer_Name=Panasonic, Mouser Part Number=667-ERA-8AEB7153V, Arrow Part Number=ERA-8AEB7153V, Arrow Price/Stock=https://www.arrow.com/en/products/era-8aeb7153v/panasonic, Datasheet Link=https://industrial.panasonic.com/cdbs/www-data/pdf/RDM0000/AOA0000C307.pdf, Height=0.7mm, Manufacturer_Part_Number=ERA-8AEB7153V, Mouser Price/Stock=https://www.mouser.co.uk/ProductDetail/Panasonic/ERA-8AEB7153V?qs=MNPzkKEzRtQwT%2F%2F5AstjZA%3D%3D
R32: library part ERA-8AEB6041V, "Resistor", Manufacturer_Name=Panasonic, Datasheet Link=https://industrial.panasonic.com/cdbs/www-data/pdf/RDM0000/AOA0000C307.pdf, Height=0.7mm, Manufacturer_Part_Number=ERA-8AEB6041V
R33: library part ERA-8AEB2102V, "Resistor", Manufacturer_Name=Panasonic, Mouser Part Number=667-ERA-8AEB2102V, Datasheet Link=https://industrial.panasonic.com/cdbs/www-data/pdf/RDM0000/AOA0000C307.pdf, Height=0.7mm, Manufacturer_Part_Number=ERA-8AEB2102V, Mouser Price/Stock=https://www.mouser.co.uk/ProductDetail/Panasonic/ERA-8AEB2102V?qs=MNPzkKEzRtSGOL2oFTGtSQ%3D%3D
R34: library part ERA-8ARB203V, "Resistor", Manufacturer_Name=Panasonic, Mouser Part Number=667-ERA-8ARB203V, Datasheet Link=https://industrial.panasonic.com/cdbs/www-data/pdf/RDM0000/AOA0000C307.pdf, Height=0.7mm, Manufacturer_Part_Number=ERA-8ARB203V, Mouser Price/Stock=https://www.mouser.co.uk/ProductDetail/Panasonic/ERA-8ARB203V?qs=6%252Bc%252B2ke79U6sTVaKLKhC4g%3D%3D
R35: library part ERA-8AEB3012V, "Resistor", Manufacturer_Name=Panasonic, Mouser Part Number=667-ERA-8AEB3012V, Arrow Part Number=ERA-8AEB3012V, Arrow Price/Stock=https://www.arrow.com/en/products/era-8aeb3012v/panasonic, Datasheet Link=https://industrial.panasonic.com/cdbs/www-data/pdf/RDM0000/AOA0000C307.pdf, Height=0.7mm, Manufacturer_Part_Number=ERA-8AEB3012V, Mouser Price/Stock=https://www.mouser.co.uk/ProductDetail/Panasonic/ERA-8AEB3012V?qs=MNPzkKEzRtRrrEBjINaeEw%3D%3D
S1: "Switch", Manufacturer_Name=E-Switch, Mouser Part Number=612-TL1030AF350AQJ, Datasheet Link=https://configured-product-images.s3.amazonaws.com/2D/specs/TL1030AF350AQJ.pdf, Height=1.95mm, Manufacturer_Part_Number=TL1030AF350AQJ, Mouser Price/Stock=https://www.mouser.co.uk/ProductDetail/E-Switch/TL1030AF350AQJ?qs=VVKQmw408U%2FgalG8VZqjEg%3D%3D

## Free pads (board coordinates)
  round 60 hole 131.89 unplated: 1(1220,1210) 1(1220,4790) 1(6279,1210) 1(6279,4790)

## Via types
v1: diameter 24.02, hole 11.81, Top Layer to Bottom Layer, 144 vias
v2: diameter 33, hole 20, Top Layer to Bottom Layer, 2 vias

## Nets (pads, with @x,y where several pads share a name; then routed paths per layer and width w, separated by ;. In a path a pad name is that pad's centre, name@x,y a point inside that pad or via, vN(x,y) a via of type N, cw(c..) or ccw(c..) an arc to the next point about the centre after c; other vN are vias at no path point)
3.3V: 3.3V.2 C2.1 C3.1 C4.1 C5.1 C6.1 C7.1 C8.1 C9.1 C10.1 C11.1 C12.1 C13.1 C14.1 C15.1 C16.1 C17.1 C18.1 C19.1 C20.1 C27.1 C28.1 C29.1 C30.1 C34.1 IC2.1 IC3.1 IC3.13 IC3.19 IC3.32 IC3.48 IC3.64 IC7.2 IC7.3 IC8.3 J2.3 J9.3 L1.2 R15.1 R21.2 R28.1 R29.1 R39.2 | length 9942.6
  Top Layer w11: J9.3@1677,4853 1677,4625 1509,4457 1509,4026.09 1603.21,3931.88 C15.1 C16.1 1735.39,3932.27 IC3.19 1981.62,3932.27 2020.99,3971.64 ; C19.1 1911.46,4152.17 C20.1 1909.29,4134.25 1923.37,4120.17 1939.12,4120.17 1971.42,4087.87 IC3.13 1971.51,4049.81 1971.51,4021.12 2020.99,3971.64 ; C34.1 2001.88,3370.25 2040.7,3331.43 2040.7,3306.07 IC8.3 ; IC3.48 2207.64,3574.96 2208.04,3574.56 2231.17,3574.56 2264.41,3541.33 2265.3,3541.33 2279.88,3526.75 C12.1 C11.1 C11.1@2279.88,3407.25 ; R21.2 2249.8,3250.09 2279.88,3280.17 C11.1@2279.88,3407.25 ; C8.1 2366.88,3329.75 2352.3,3344.33 2342.81,3344.33 C11.1@2279.88,3407.25 ; J2.3@2472,4755.42 2472,4388 ; R39.2 2515,4360.8 2497.86,4377.93 2482.07,4377.93 2472,4388 ; R28.1@3177,4025.09 2707.28,4025.09 2680.25,4052.12 ; C30.1@3191.79,4205.12 C29.1 3199.59,4264.65 3296.33,4264.65 IC7.2 ; IC7.3 3296.33,4211.35 3200.23,4211.35 3191.79,4202.91 2831.04,4202.91 2680.25,4052.12 ; 2020.99,3971.64 IC3.64 2308.85,3971.64 2308.94,3971.73 2308.94,3994.81 C10.1@2364.04,4049.91 ; C10.1@2364.04,4049.91 2379.79,4049.91 C10.1 C9.1 2680.25,4052.12 ; C10.1@2364.04,4049.91 IC3.1 2207.64,4135.76 C18.1 2221.88,4253.75 2236.46,4268.33 2237.33,4268.33 2273,4304 2388,4304 2472,4388
  Top Layer w12: C13.1 C14.1 1784.97,3627.24 1811.06,3653.33 1811.06,3676.27 1811.15,3676.36 IC3.32 ; IC3.32@1857.13,3676.27 1914.27,3676.27 1984,3746 2136,3746 2207.54,3674.46 2207.54,3598.19 IC3.48 ; 3.3V.2 2823.2,3610.9 2841.22,3628.91 R29.1 ; R15.1 2907.91,3417.78 2855,3470.69 R29.1 ; v1(3287.88,4014.05) 3287.88,3963.24 C2.1 ; v1(3336,3790) 3174.91,3628.91 R29.1
  Top Layer w15: IC8.3 2048,3281.55 2079.46,3250.09 R21.2 ; R28.1 3201.78,4029.09 3257.17,3973.7 3277.42,3973.7 C2.1 3298.75,3961.12 3318.63,3981 IC2.1
  Top Layer w20: C8.1 C7.1 C6.1 C5.1 C4.1 2367.37,2934.94 2367.37,2840.49 C3.1 2367.87,2798.13 2401,2765 2521,2765 2726.84,2970.84 L1.2@2726.84,3046.13
  Top Layer w45: L1.2@2726.84,3046.13 L1.2@2738.15,3057.44 ; C27.1@2790,2625 2790,2735 2790,3005.59 L1.2@2738.15,3057.44 ; R15.1 2907.91,3282.32 2738.15,3112.56 L1.2 L1.2@2738.15,3057.44
  Bottom Layer w12: v1(3287.88,4014.05) 3336,3965.93 v1(3336,3790)
"3.3V (High Side)": C1.1 C31.1 C32.1 IC1.3 IC2.8 IC7.7 R26.1 R27.1 | length 1210
  Top Layer w15: IC2.8 3596.07,3975.7 3616.7,3975.7 3618.71,3973.7 3672.42,3973.7 C1.1 3693.71,3969.83 3731.83,3969.83 3841,4079 3841,4170.65 C31.1@3792.54,4219.12 ; IC7.7 3717.16,4263 ; C32.1 3762.02,4290.46 3734.57,4263 3717.16,4263 ; R27.1 3886.78,3959.54 3900.93,3973.7 3900.93,3987.48 4014,4100.54 IC1.3 4014,4192 3986.88,4219.12 C31.1@3792.54,4219.12 ; 3717.16,4263 3761.04,4219.12 C31.1 C31.1@3792.54,4219.12
24V: 24V.2 "PC FAIL.2" C25.1 C26.1 IC5.15 IC5.16 IC6.2 LED_+.2 LED_-.2 LED_HB.2 LED_PC.2 LED_SLR.2 R30.1 | length 5926.4
  Top Layer w11: LED_SLR.2 1549.97,1999.9 1677.15,2127.07 1707.97,2127.07 LED_-.2 v1(2443.8,2151.1) 2504,2090.89 2504,2088.93 2528.03,2064.9 2532,2068.87 2532,2342.09 ; LED_HB.2 1721.9,4416 v1(1827,4416) ; LED_+.2 1733.97,2812.1 1779.07,2767 v1(1826,2767) ; 24V.2 2531.1,2066 R30.1 ; C25.1 3314.98,2300.54 3689.18,1926.34 LED_PC.2
  Top Layer w15: IC5.16 IC5.15
  Top Layer w20: IC5.16 2748.23,1970.52 2746.87,1971.87 2720.24,1971.87 2638.91,2053.2 R30.1 2638.91,2078.8 2860.66,2300.54 C26.1 C25.1 ; C25.1@3314.98,2300.54 3341,2326.57 IC6.2
  Bottom Layer w11: v1(1827,4416) 1826,4415 v1(1826,2767) 1826.95,2767 2442.85,2151.1 v1(2443.8,2151.1)
"24V Unfused": C38.1 IC5.1 IC5.2 J1.1 R31.1 | length 736.5
  Top Layer w15: IC5.1 IC5.2
  Top Layer w20: R31.1 2673.36,1735.52 C38.1 2746.87,1737.88 2748.23,1736.52 IC5.1
  Top Layer w35: R31.1 2662.54,1672.06 2592,1601.52 2592,1449.09 J1.1
"!FLT CAN": IC3.43 IC8.5 R21.1 | length 903.5
  Top Layer w11: IC8.5@1998,3102.45 1934,3166.45 1934,3454 1992,3512 2058,3512 2109.21,3563.21 IC3.43
  Top Layer w15: IC8.5 1998,3102.45 2031.46,3135.91 R21.1
"!FLT EF": IC5.14 R30.2 | length 134.8
  Top Layer w15: R30.2 2768.22,2050.86 2768.22,2021.56 2799.41,1990.37 IC5.14
"+ Relay GND": D1.2 J4.1 M1.3 | length 436.3
  Top Layer w20: J4.1@1240.43,3215.91 1311.72,3144.61 D1.2 M1.3
"+ Signal": IC3.33 IC4_+.1 M1.1 R42.1 | length 690.2
  Top Layer w11: R42.1 1533.8,3413 1589.09,3357.7 1589.09,3338.52 M1.1 1649.21,3332.21 1769.8,3452.8 ; IC4_+.1 1769.8,3452.8 ; IC3.33 1912.36,3574.96 1911.96,3574.56 1891.56,3574.56 1769.8,3452.8
"- Relay GND": D2.2 J6.1 M2.3 | length 447
  Top Layer w20: J6.1@1240.43,2557 1319.31,2478.11 1556.5,2478.11 D2.2 1557,2478.61 M2.3
"- Signal": IC3.35 IC4_-.1 M2.1 R43.1 | length 1318.1
  Top Layer w11: R43.1 1565.8,2744.91 1582.93,2727.78 1582.93,2692.56 1594.4,2681.09 1594.4,2677.15 1634.25,2717 1716.17,2717 1753.64,2679.52 1762.5,2679.52 IC4_-.1@1769.8,2672.23 ; IC4_-.1 IC4_-.1@1769.8,2672.23 ; IC3.35 1951.73,3501.73 1869.54,3419.54 1869.54,2763.11 1785.95,2679.52 1777.09,2679.52 IC4_-.1@1769.8,2672.23
BOOT: C24.1 IC6.1 | length 115.6
  Top Layer w15: v1(3230,2373) 3289.54,2373 IC6.1
  Bottom Layer w15: C24.1 3230,2419.88 v1(3230,2373)
BOOT0: IC3.60 R36.1 | length 198.2
  Top Layer w12: IC3.60 2348.1,3892.9 2388,3853 2445.09,3853 R36.1
"CAN H": D4.1 FL1.4 J10.2 R19.1 | length 913.6
  Top Layer w11: FL1.4 2138.43,2043.22 2138.43,2027.36 2222,1943.79 2222,1880 2165,1823 2165,1799.44 R19.1 2165,1785.44 2165,1675.68 2123.26,1633.93 2123.26,1626.93 D4.1 2123.26,1607.22 2123.26,1600.22 2141.95,1581.53 2141.95,1254 J10.2
"CAN L": D4.2 FL1.3 J10.1 R20.1 | length 943.7
  Top Layer w11: J10.1 2007,1260.95 2007,1592.48 2021.74,1607.22 2028.74,1607.22 2031.6,1610.08 D4.2@2031.6,1617.08 ; FL1.3 2027.79,2046.57 2015.57,2034.36 2008.57,2034.36 1916,1941.79 1916,1880 1973,1823 1973,1799.44 R20.1 1973,1785.44 1973,1675.68 2021.74,1626.93 2028.74,1626.93 2031.6,1624.08 D4.2@2031.6,1617.08 ; D4.2 D4.2@2031.6,1617.08
"CAN RX": IC3.44 IC8.4 | length 426.9
  Top Layer w12: IC8.4 1959,3337.77 1959,3450 1999,3490 2069,3490 2128.9,3549.9 IC3.44
"CAN TX": IC3.45 IC8.1 | length 299.6
  Top Layer w11: IC8.1@2148.49,3299.26 IC3.45@2148.49,3598
  Top Layer w12: IC8.1 IC8.1@2148.49,3299.26 ; IC3.45@2148.49,3598 IC3.45
CANCH: FL1.1 IC8.7 | length 862.3
  Top Layer w11: IC8.7 2105,3078.23 2105,2264.64 2126.21,2243.43 FL1.1
CANCL: FL1.2 IC8.6 | length 859
  Top Layer w11: FL1.2 2040,2246.78 2040,2258.89 2041,2259.89 2041,3078.23 IC8.6
COMP: C35.1 IC6.6 R16.1 | length 204.8
  Top Layer w15: IC6.6 3391,2651.15 3419.06,2679.2 C35.1 3497.26,2692 R16.1
dVdT: C37.1 IC5.12 | length 89.4
  Top Layer w15: C37.1@2840,2035.37 2850.59,2024.78 IC5.12
FB: IC6.5 R15.2 R18.1 | length 1184.5
  Top Layer w15: R18.1 3503,2903 3564,2842 3564,2660 3492,2588 IC6.5
  Top Layer w25: R15.2 3023.48,3402.61 3051.39,3402.61 3423.06,3030.94 R18.1
GND: C2.2 C3.2 C4.2 C5.2 C6.2 C7.2 C8.2 C9.2 C10.2 C11.2 C12.2 C13.2 C14.2 C15.2 C16.2 C17.2 C18.2 C19.2 C20.2 C21.2 C22.2 C23.2 C25.2 C26.2 C27.2 C28.2 C29.2 C30.2 C33.2 C34.2 C35.2 C36.2 C37.2 C38.2 D4.3 D5.1 D5.2 IC2.4 IC3.12 IC3.18 IC3.63 IC4_+.2 IC4_-.2 IC4_HB.2 IC4_PC.2 IC4_SLR.2 IC5.6 IC5.8 IC5.9 IC5.17 IC6.7 IC6.9 IC7.1 IC7.4 IC8.2 IC9.2 J1.2 J2.1 J2.2 J9.5 J9.7 J9.11 J12.2 M1.2 M2.2 M3.2 R17.2 R18.2 R32.2 R33.2 R35.2 R36.2 R37.2 R38.2 R42.2 R43.2 R44.2 S1.2 S1.4 | length 619.7
  Top Layer w11: C16.2 1735,4010 1793.05,3951.95 IC3.18 ; IC8.2 2098,3371.88 C34.2
  Top Layer w15: C30.2 3206.75,4094.88 3274.87,4163 IC7.4 ; C29.2 3205.76,4379.54 3272.31,4313 IC7.1 ; C2.2@3283,3850.88 3298.75,3850.88 3318.63,3831 IC2.4